# Altium PCB 2012_BALISE_CARTE_EMETTEUR.PCBDOC
Units mil, origin at the board's own origin, x right, y up, seen from the top; angles counter-clockwise.
Board outline 2480 x 2480 mil, 4 copper layers (1-TOP, 2-Signal, 3-GND, 4-BOT); 90 components, 78 nets, 405 pads, 0 vias.
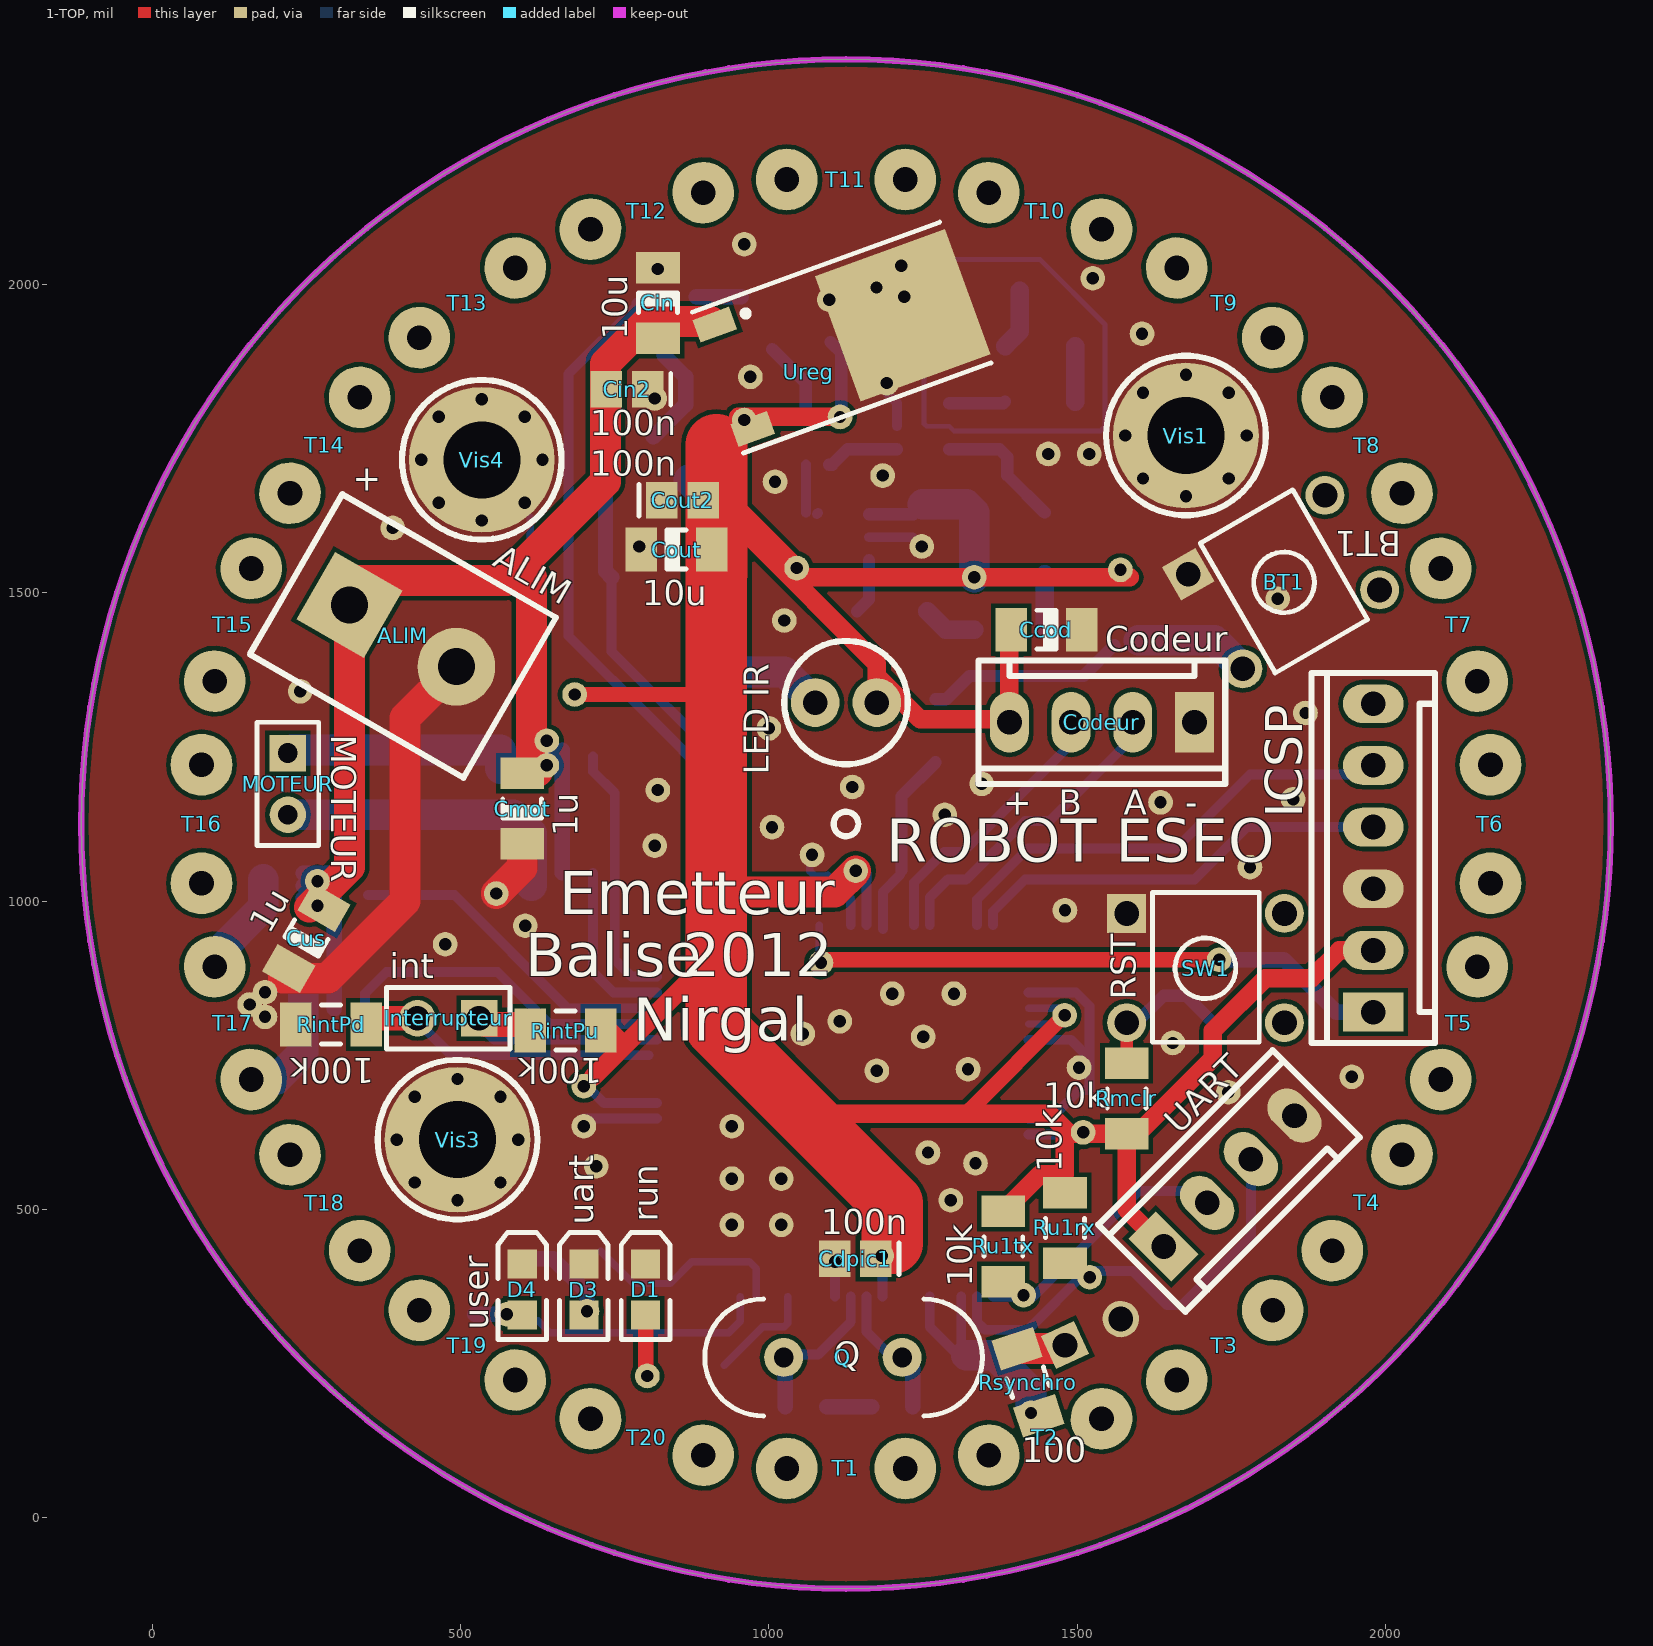
[diagram p0: 1-TOP view]
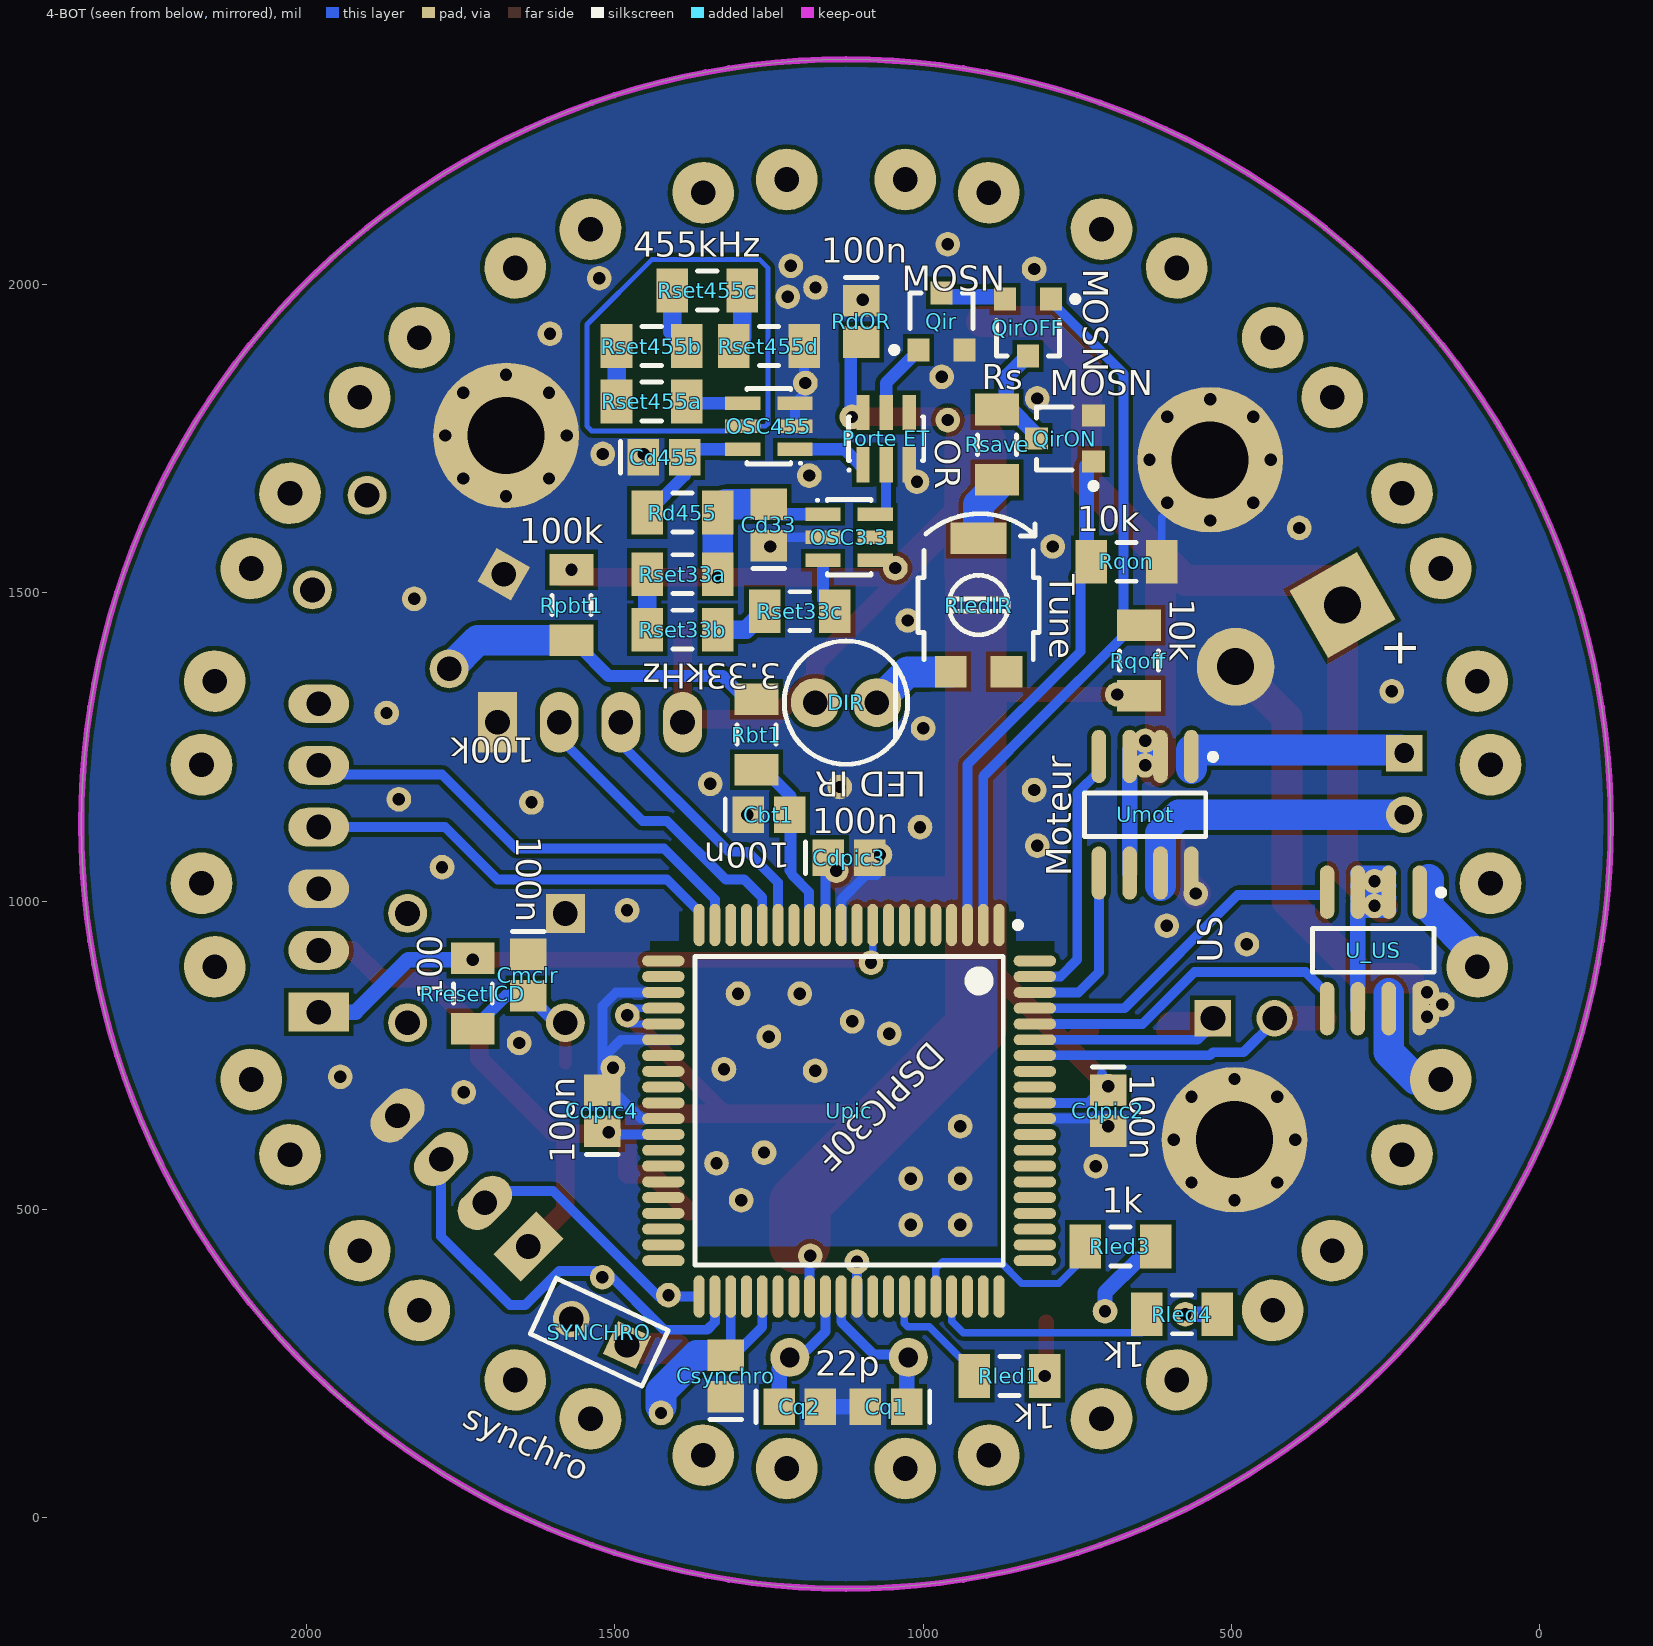
[diagram p1: 4-BOT view, seen from below]
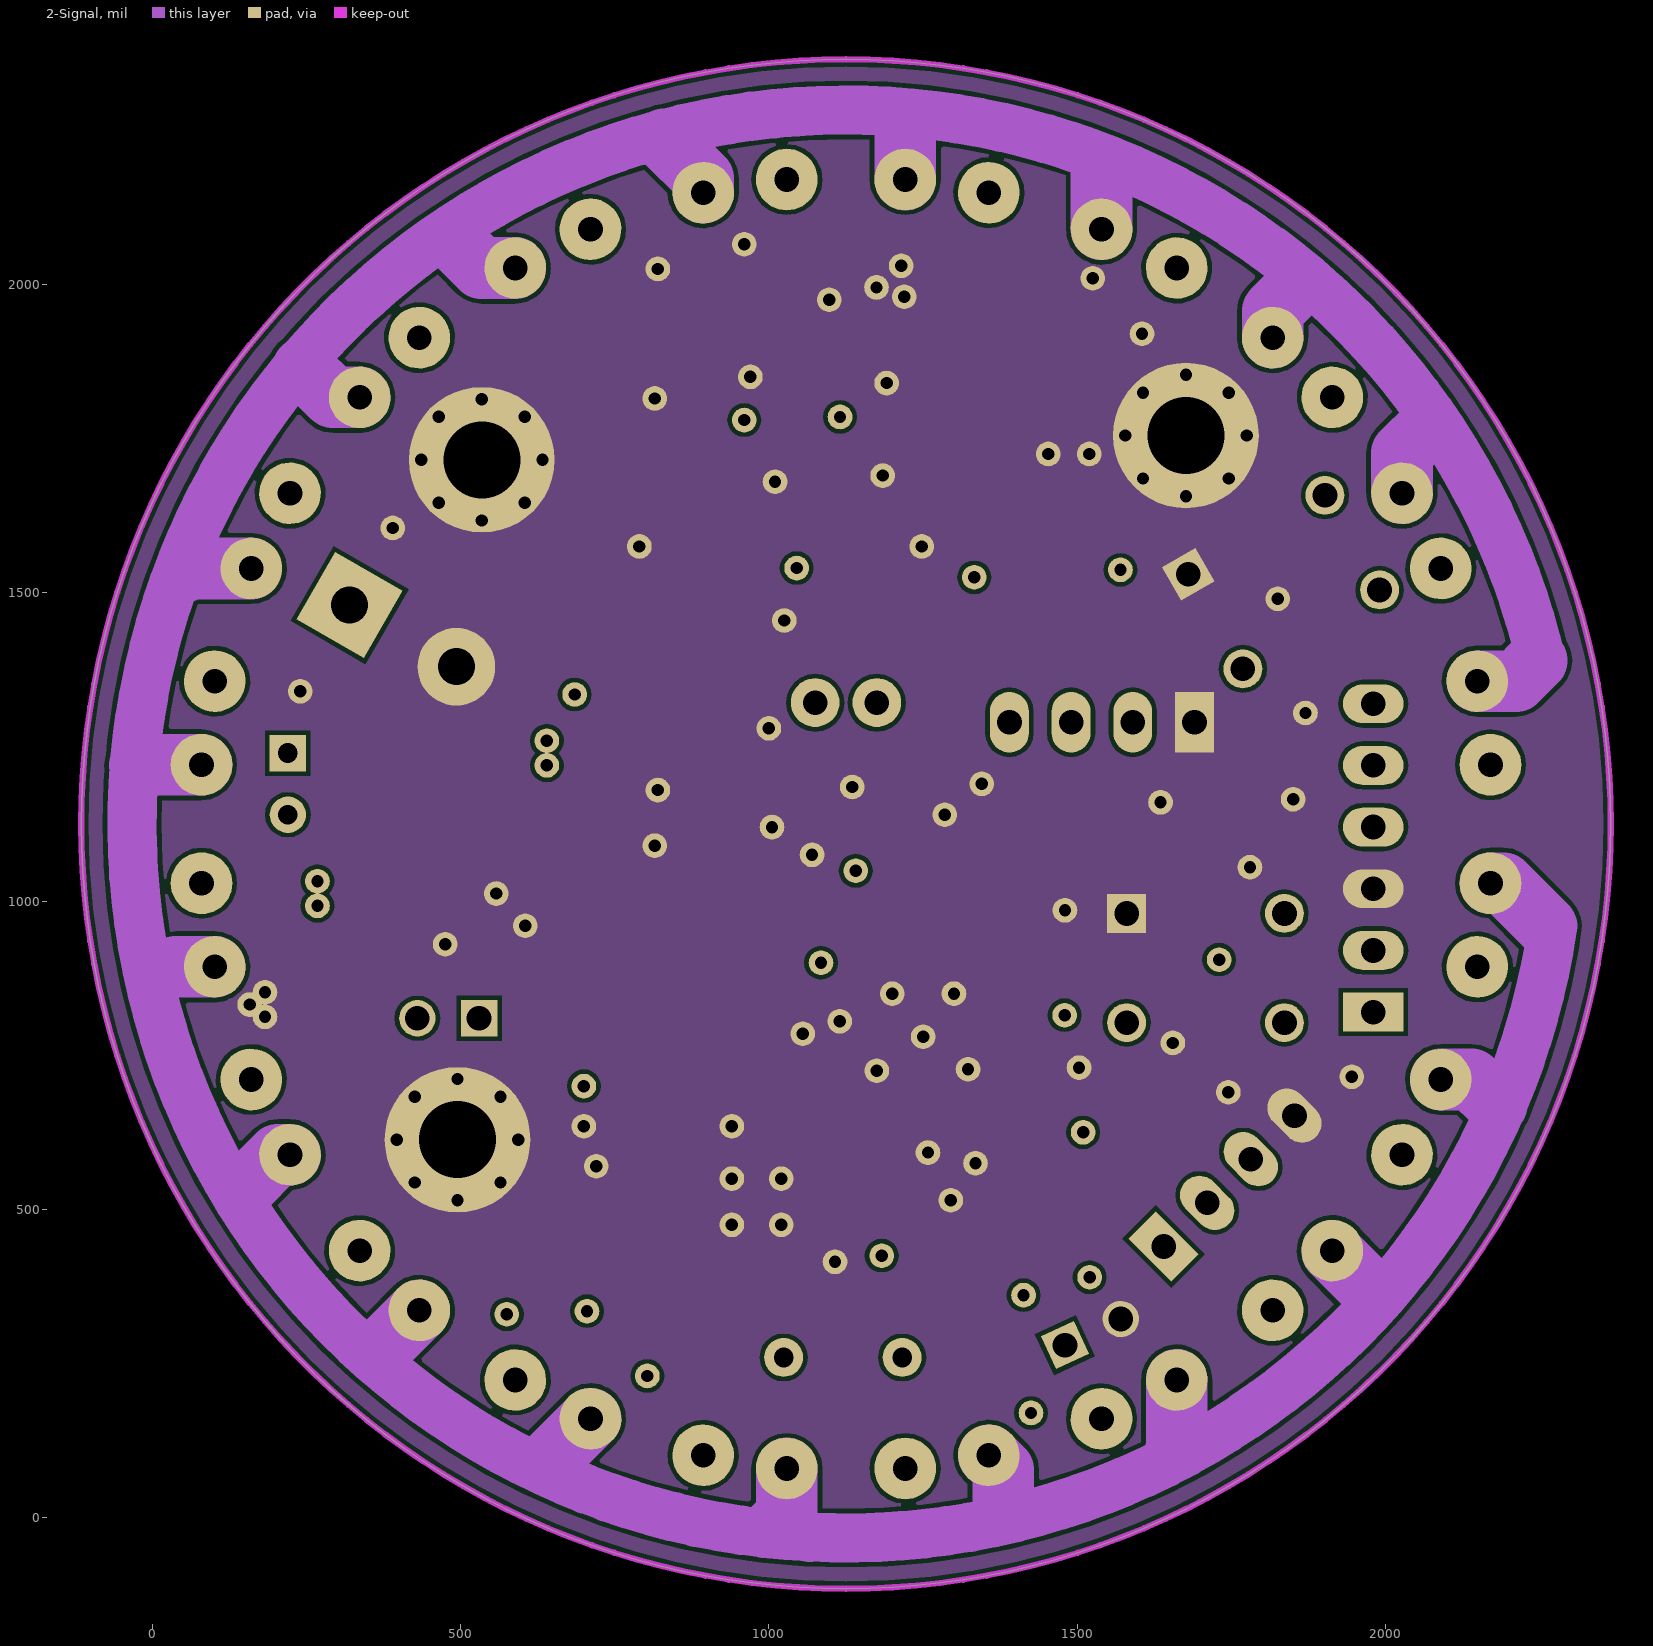
[diagram p2: 2-Signal]
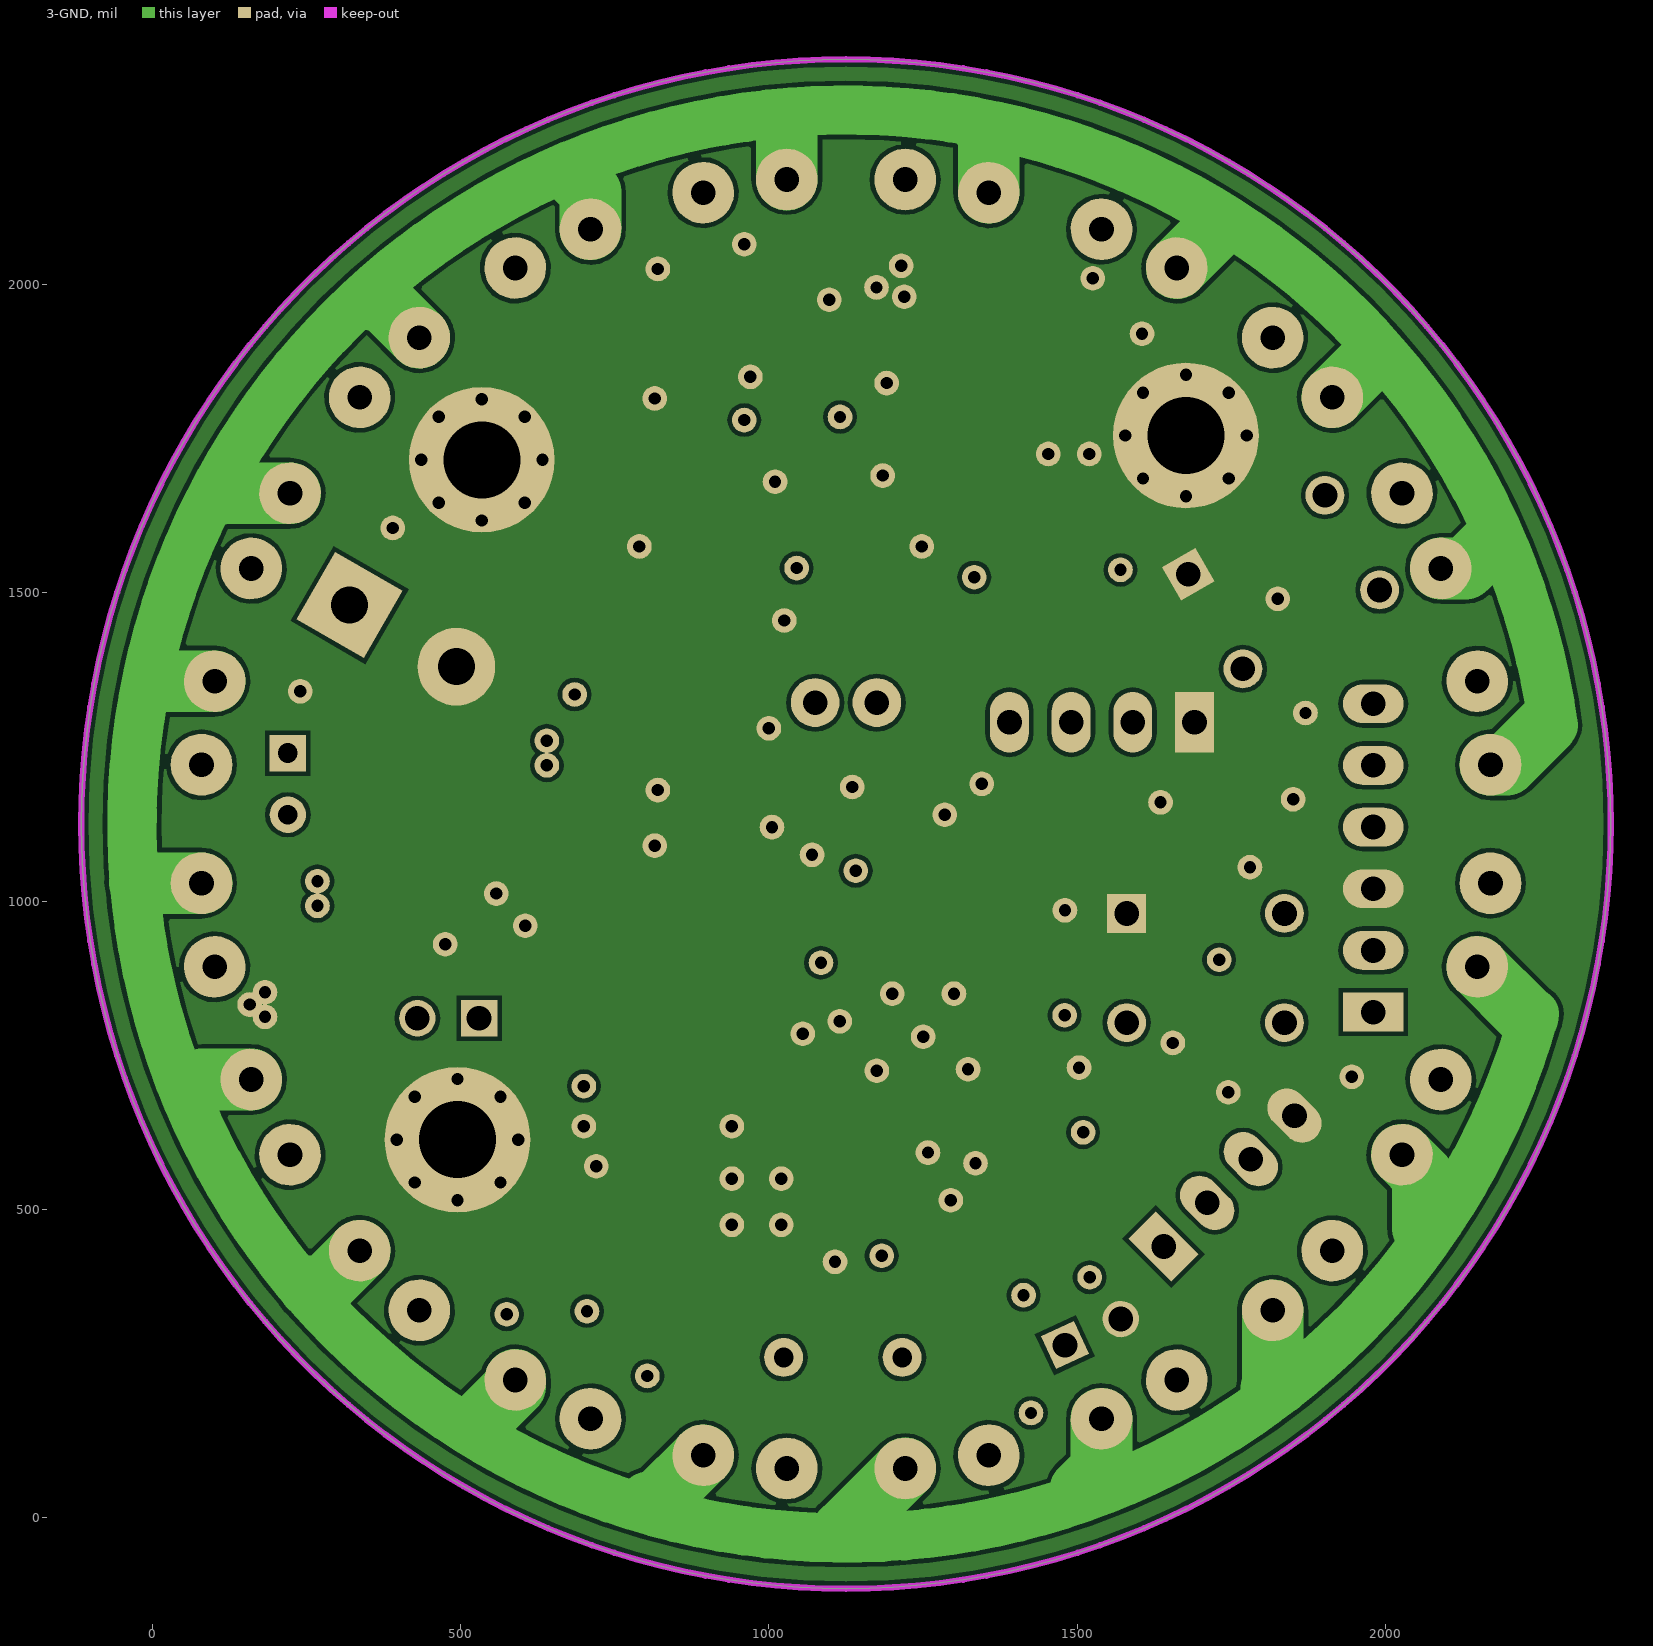
[diagram p3: 3-GND]
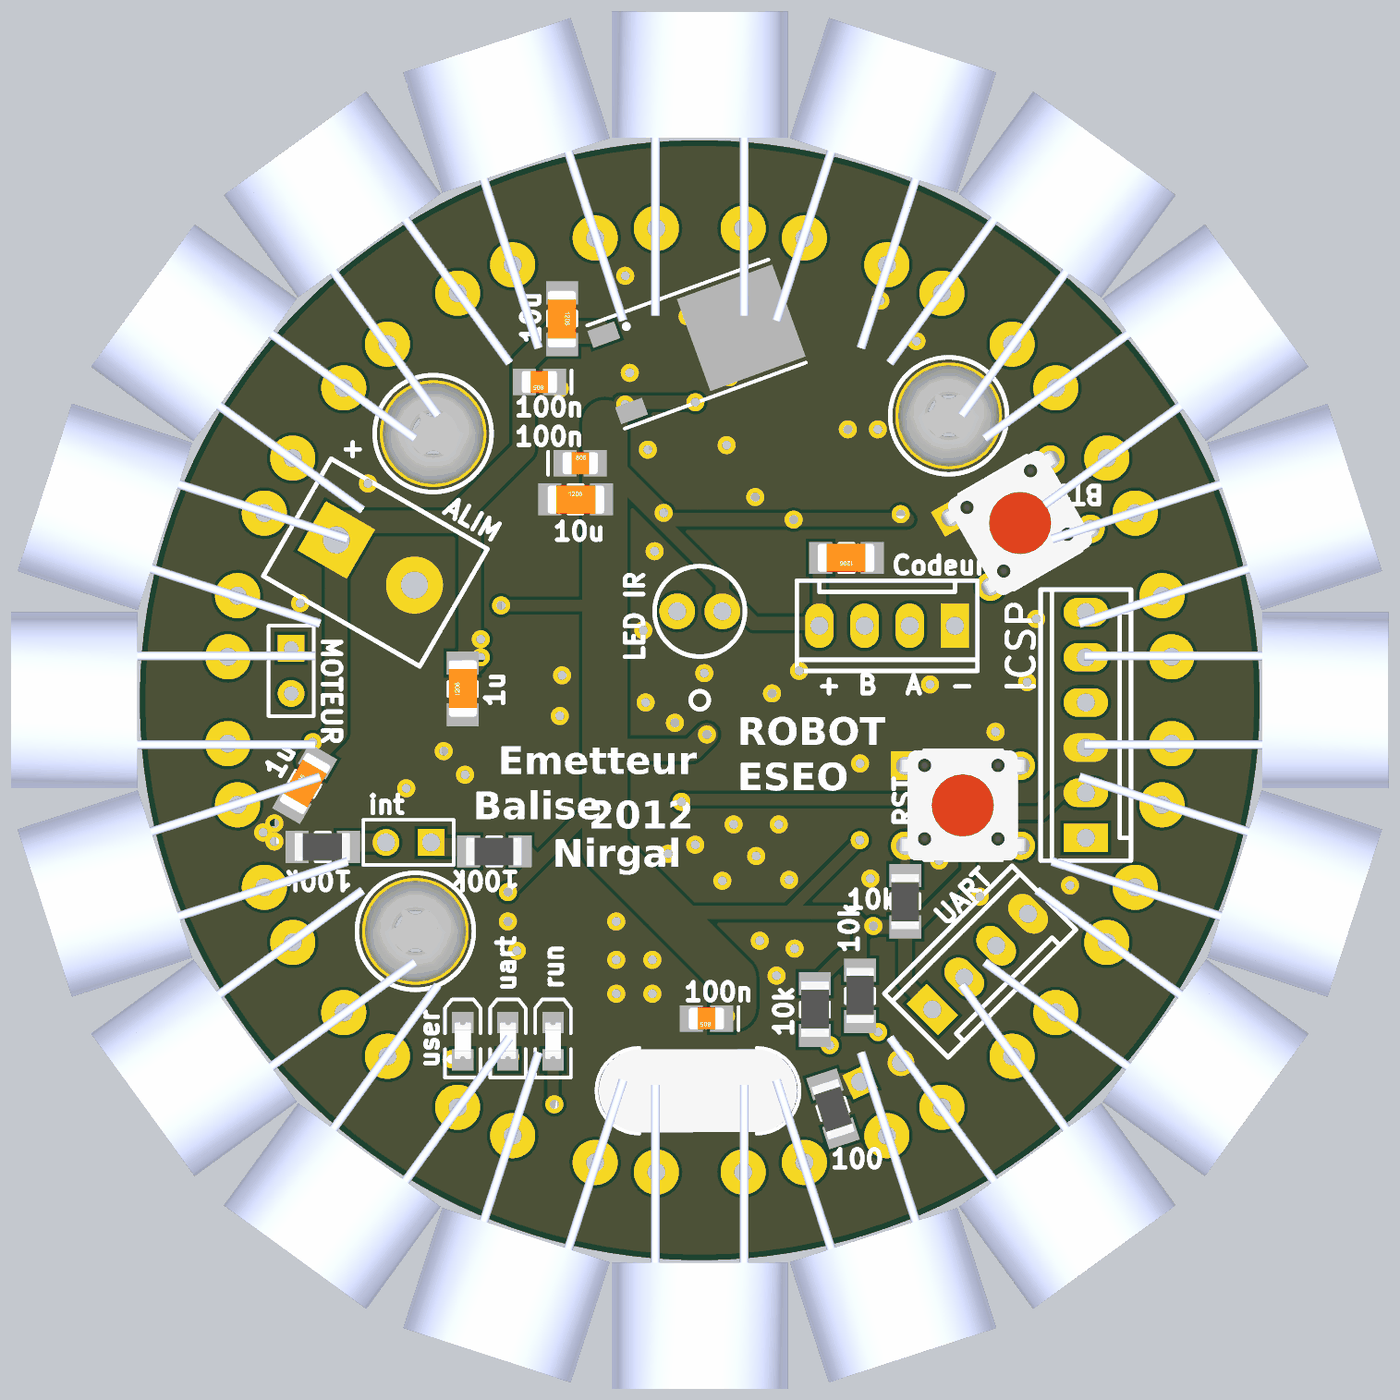
[diagram p4: 3D render of the assembled board from above, using the file's embedded part models]
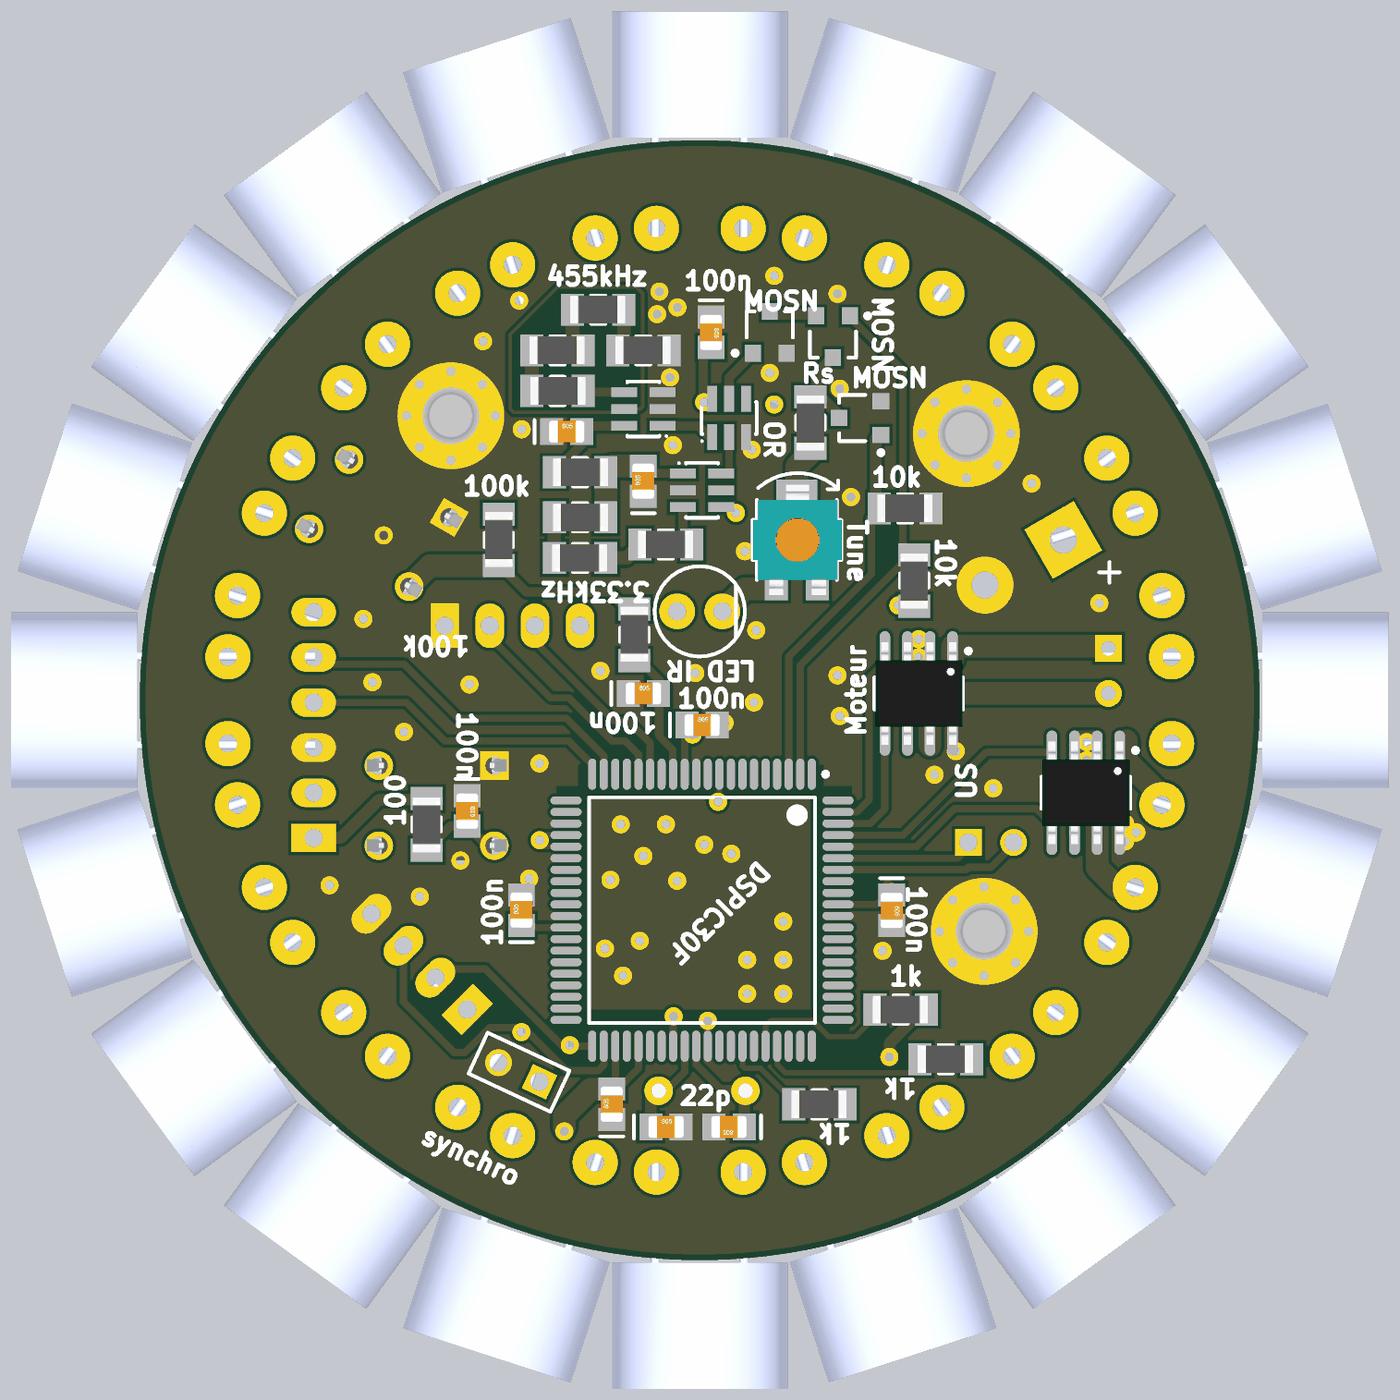
[diagram p5: 3D render of the assembled board from below, using the file's embedded part models]

## Layer stack, top to bottom
1-TOP: signal copper 1.4
Dielectric: core 12.6, FR-4, Dk 4.8
2-Signal: signal copper 1.4
Dielectric: prepreg 12.6, FR-4, Dk 4.8
3-GND: signal copper 1.4
Dielectric: core 12.6, FR-4, Dk 4.8
4-BOT: signal copper 1.4

## Board outline
-115,1125 ccw(c1125,1125) 1125,-115 ccw(c1125,1125) 2365,1125 ccw(c1125,1125) 1125,2365 ccw(c1125,1125)

## Design rules (kind name [scope] priority, off if disabled: settings)
Clearance [All] p1: gap=7
FabricationTestPointUsage TestPointUsage [All] p1: valid=0 allowmultiple=FALSE
FabricationTestpoint Testpoint [(IsPad And (OnTopLayer Or OnBottomLayer))] p1: side=3 testpointundercomponent=TRUE minsize=40 maxsize=100 preferedsize=60 minholesize=0 maxholesize=40 preferedholesize=32 testpointgrid=1 allowsidetop=TRUE allowsidebottom=TRUE usegrid=TRUE gridtolerance=0.01
PlaneConnect [All] p1: planeconnectstyle=Direct reliefexpansion=25 reliefentries=4 reliefconductorwidth=12 reliefairgap=15
PolygonConnect [All] p1: connectstyle=Direct reliefconductorwidth=10 reliefentries=4 polygonreliefangle="90 Angle"
RoomDefinition 2012_BALISE_CARTE_EMETTEUR [InComponentClass('2012_BALISE_CARTE_EMETTEUR')] p1: confinementstyle=ConfineIn formatcopy=TRUE lockcomponents=FALSE outline -6448.4,-2900 -4448.4,-2900 -4448.4,-1900 -6448.4,-1900
RoutingLayers RoutingLayers_1 [All] p1: top layer_v5=TRUE mid layer 1_v5=FALSE mid layer 2_v5=FALSE bottom layer_v5=TRUE
RoutingLayers [All] p2: top layer_v5=TRUE mid layer 1_v5=FALSE mid layer 2_v5=FALSE bottom layer_v5=TRUE
RoutingVias [All] p1: holewidth=24 width=50 viastyle="Through Hole" minholewidth=24 minwidth=50 maxholewidth=24 maxwidth=50
SilkscreenOverComponentPads [All] p1: minsilkscreentomaskgap=10
SolderMaskExpansion [All] p1: expansion=0
Width ALIM [InNet('0') Or InNet('VDD')] p1: maxlimit=100 minlimit=10 preferedwidth=25
Width [All] p2: maxlimit=150 minlimit=5 preferedwidth=16
23 further rules are at their usual default settings.

## Components (designator, comment, footprint, x,y, rotation, side; value= is the part's Value field where it differs from the comment)
ALIM "ALIM" BORNIER2 320,1480 r330 top
BT1 "SW_Pushbutton_6x6mm_Vertical" "Switch 6x6 Vertical" 1680,1530 r30 top
Cbt1 "100nF" C0805_N 1250,1140 r180 bottom
Ccod "1uF" C1206_N 1450,1440 r180 top
Cd33 "100n" C0805_N 1250,1610 r90 bottom
Cd455 "100n" C0805_N 1420,1720 r180 bottom
Cdpic1 "100nF" C0805_N 1140,420 r180 top
Cdpic2 "100nF" C0805_N 700,660 r270 bottom
Cdpic3 "100nF" C0805_N 1120,1070 r180 bottom
Cdpic4 "100nF" C0805_N 1520,660 r90 bottom
Cin "10uF" C1206_N 820,1970 r270 top
Cin2 "10nF" C0805_N 770,1830 r180 top
Cmclr "100nF" C0805_N 1640,880 r270 bottom
Cmot "1uF" C1206_N 600,1150 r90 top
Codeur "BARRETTE4" HE14_4 1690,1290 r180 top
Cout "10uF" C1206_N 850,1570 r0 top
Cout2 "100nF" C0805_N 860,1650 r0 top
Cq1 "22pF" C0805_N 1060,180 r0 bottom
Cq2 "22pF" C0805_N 1200,180 r180 bottom
Csynchro "1nF" C0805_N 1320,230 r90 bottom
Cus "1uF" C1206_N 250,940 r60 top
D1 "LED" LED_0805 800,370 r90 top
D3 "LED" LED_0805 700,370 r90 top
D4 "LED" LED_0805 600,370 r90 top
DIR "LED" LED5 1075,1321.85 r90 bottom
ICSP "BARRETTE6" HE14_6 1980,820 r90 top
Interrupteur "Interrupteur" HEADER2#1 530,810 r180 top
MOTEUR "MOTEUR" HEADER2#2 220,1240 r270 top
OSC3.3 "LTC6900" SOT23-6 1120,1590 r270 bottom
OSC455 "LTC6906" SOT23-6 1250,1770 r90 bottom
"Porte ET" "FAR 1697256 (SOT23-5 !)" SOT23-6 1060,1750 r180 bottom
Q "QU" HC49US 1120,260 r180 top
Qir "IRLML2803" SOT-23 970,1940 r180 bottom
QirOFF "IRLML2803" SOT-23 830,1930 r0 bottom
QirON "IRLML2803" SOT-23 770,1750 r90 bottom
Rbt1 "100k" R1206_N 1270,1270 r90 bottom
Rd455 "1K" R1206_N 1390,1630 r180 bottom
RdOR "100n" C0805_N 1100,1940 r270 bottom
RintPd "100k" R1206_N 290,800 r180 top
RintPu "100k" R1206_N 670,790 r180 top
Rled1 "1K" R1206_N 860,230 r0 bottom
Rled3 "1K" R1206_N 680,440 r0 bottom
Rled4 "1K" R1206_N 580,330 r0 bottom
RledIR "100" Trimmer_Bourns_3314G 910,1480 r180 bottom
Rmclr "10k" R1206_N 1580,680 r270 top
Rpbt1 "100k" R1206_N 1570,1480 r90 bottom
Rqoff "10k" R1206_N 650,1390 r270 bottom
Rqon "10k" R1206_N 670,1550 r0 bottom
RresetICD "100" R1206_N 1730,850 r270 bottom
Rsave "100" R1206_N 880,1740 r270 bottom
Rset33a "0K" R1206_N 1390,1530 r180 bottom
Rset33b "0K" R1206_N 1390,1440 r0 bottom
Rset33c "600K" R1206_N 1200,1470 r0 bottom
Rset455a "220K" R1206_N 1440,1810 r180 bottom
Rset455b "0K" R1206_N 1440,1900 r0 bottom
Rset455c "0K" R1206_N 1350,1990 r0 bottom
Rset455d "0K" R1206_N 1250,1900 r0 bottom
Rsynchro "100" R1206_N 1420,220 r288 top
Ru1rx "10k" R1206_N 1480,470 r90 top
Ru1tx "10k" R1206_N 1380,440 r90 top
SW1 "SW_Pushbutton_6x6mm_Vertical" "Switch 6x6 Vertical" 1580,980 r0 top
SYNCHRO "SYNCHRO" HEADER2#1 1480,280 r25 bottom
T1 "40kHz" "MA40S4R/S Transducteur US - 3D haut de carte" 1125,80 r180 top locked
T2 "40kHz" "MA40S4R/S Transducteur US - 3D haut de carte" 1448,131 r198 top locked
T3 "40kHz" "MA40S4R/S Transducteur US - 3D haut de carte" 1739,280 r216 top locked
T4 "40kHz" "MA40S4R/S Transducteur US - 3D haut de carte" 1970,511 r234 top locked
T5 "40kHz" "MA40S4R/S Transducteur US - 3D haut de carte" 2119,802 r252 top locked
T6 "40kHz" "MA40S4R/S Transducteur US - 3D haut de carte" 2170,1125 r270 top locked
T7 "40kHz" "MA40S4R/S Transducteur US - 3D haut de carte" 2119,1448 r288 top locked
T8 "40kHz" "MA40S4R/S Transducteur US - 3D haut de carte" 1970,1739 r306 top locked
T9 "40kHz" "MA40S4R/S Transducteur US - 3D haut de carte" 1739,1970 r324 top locked
T10 "40kHz" "MA40S4R/S Transducteur US - 3D haut de carte" 1448,2119 r342 top locked
T11 "40kHz" "MA40S4R/S Transducteur US - 3D haut de carte" 1125,2170 r0 top locked
T12 "40kHz" "MA40S4R/S Transducteur US - 3D haut de carte" 802,2119 r18 top locked
T13 "40kHz" "MA40S4R/S Transducteur US - 3D haut de carte" 511,1970 r36 top locked
T14 "40kHz" "MA40S4R/S Transducteur US - 3D haut de carte" 280,1739 r54 top locked
T15 "40kHz" "MA40S4R/S Transducteur US - 3D haut de carte" 131,1448 r72 top locked
T16 "40kHz" "MA40S4R/S Transducteur US - 3D haut de carte" 80,1125 r90 top locked
T17 "40kHz" "MA40S4R/S Transducteur US - 3D haut de carte" 131,802 r108 top locked
T18 "40kHz" "MA40S4R/S Transducteur US - 3D haut de carte" 280,511 r126 top locked
T19 "40kHz" "MA40S4R/S Transducteur US - 3D haut de carte" 511,280 r144 top locked
T20 "40kHz" "MA40S4R/S Transducteur US - 3D haut de carte" 802,131 r162 top locked
U_US "BD6220F" SO8_N 270,920 r270 bottom
UART "BARRETTE4" HE14_4 1640,440 r45 top
Umot "BD6220F" SO8_N 640,1140 r270 bottom
Upic "dsPIC30F6010A" TQFP80_N 1120,660 r270 bottom
Ureg "MC7805BDTG" 369A-13 1080,1900 r290 top
Vis1 "Pad_M3" M3x6mm 1676.18,1754.92 r0 top locked
Vis3 "Pad_M3" M3x6mm 495.08,613.19 r0 top locked
Vis4 "Pad_M3" M3x6mm 534.45,1715.55 r0 top

## Footprints (in the part's own frame and the unit in brackets; to place one, negate y for a bottom-side part, rotate by r counter-clockwise, add the part's x,y. Pads: shape width x height; smd on the part's side, far side on the other; paste and mask are expansions set on the pad)
369A-13 [mm] "D-PAK/TO-252-AA; 3 Leads (1 Cropped); Body 10.3 (inc. leads) x 6.7 mm (LxW max)"
  rect 1x1.6 smd: 1(-2.285,-3.7) 3(2.285,-3.7)
  rect 5.5x5.7 smd: 4(0,3.7)
  silkscreen extent -3.09,-4.4 3.08,6.45
BORNIER2 [mm] "Connector; Header; 2 Position; screw terminal blocks, Pin Spacing=5.08mm"
  rect 3.2x3.2 hole 1.524: 1(0,0)
  round 3.2 hole 1.524: 2(5.08,0)
  silkscreen extent -2.54,-3.81 7.62,3.81
C0805_N [mm] "Chip Capacitor, Body 2.0x1.3mm, IPC Medium Density"
  rect 1.3x1.5 smd: 1(-0.85,0) 2(0.85,0)
  silkscreen extent -1.8,-0.65 -1.8,0.65, body extent -0.99,-0.63 1.01,0.63, height 0.8
C1206_N [mm] "Chip Capacitor, Body 3.2x1.6mm, IPC Medium Density"
  rect 1.3x1.8 smd: 1(-1.45,0) 2(1.45,0)
  silkscreen extent -0.4,-0.8 0.4,0.8, body extent -1.57,-0.81 1.63,0.79, height 1.02
HC49US [mil] "Quartz Crystal, HC49 Bas profil, Pas 4,88mm"
  round 63 hole 32: 1(-96.06,0) 2(96.06,0)
  silkscreen extent -226,-95 224,95, body extent -221,-92 219,92, height 143
HE14_4 [mm] "Connector; HE14; 4 Position; Pin Spacing=2.54mm"
  rect 1.6x2.5 hole 1.016: 1(0,0)
  oval 1.6x2.5 hole 1.016: 2(2.54,0) 3(5.08,0) 4(7.62,0)
  silkscreen extent -1.27,-2.54 8.89,2.54
HE14_6 [mm] "Connector; HE14; 6 Position; Pin Spacing=2.54mm"
  rect 1.6x2.5 hole 1.016: 1(0,0)
  oval 1.6x2.5 hole 1.016: 2(2.54,0) 3(5.08,0) 4(7.62,0) 5(10.16,0) 6(12.7,0)
  silkscreen extent -1.27,-2.54 13.97,2.54
HEADER2#1 [mm] "Connector; Header; 2 Position"
  rect 1.5x1.5 hole 1.016: 1(0,0)
  round 1.5 hole 1.016: 2(2.54,0)
  silkscreen extent -1.27,-1.27 3.81,1.27
HEADER2#2 [mm] "Connector; Header; 2 Position"
  rect 1.5x1.5 hole 0.813: 1(0,0)
  round 1.5 hole 0.813: 2(2.54,0)
  silkscreen extent -1.27,-1.27 3.81,1.27
LED5 [mil] "LED; 5mm; Pin Spacing=2.54mm"
  round 79 hole 40: 1(0,100) 2(0,0)
  silkscreen extent -100,-50 100,150
LED_0805 [mm] "SM LED; 2 Flat Leads"
  rect 1.2x1.2 smd: 1(-1.05,0) 2(1.05,0)
  silkscreen extent -2.05,-1 2.35,1, body extent -1.05,-0.64 1.06,0.64, height 1.2
M3x6mm [mm] "Vis M3 X 6mm _TORX_Tête 6mm"
  round 0.8 hole 0.508: 1(-2.5,0) 1(-1.768,-1.768) 1(-1.768,1.768) 1(0,-2.5) 1(0,2.5) 1(1.768,-1.768) 1(1.768,1.768) 1(2.5,0)
  round 6 hole 3.175: 1(0,0)
  silkscreen extent -3.29,-3.28 3.29,3.28, body extent -2.84,-2.85 2.86,2.85, height 1.67
"MA40S4R/S Transducteur US - 3D haut de carte" [mil]
  round 100 hole 40: 1(-96.06,0) 2(96.06,0)
  body extent -195,-193 195,480, height 391
R1206_N [mm] "Chip Resistor, Body 3.2x1.6mm, IPC Medium Density"
  rect 1.3x1.8 smd: 1(-1.45,0) 2(1.45,0)
  silkscreen extent -0.4,-0.8 0.4,0.8, body extent -1.68,-0.87 1.68,0.87, height 0.71
SO8_N [mm] "8-Pin Small Outline Integrated Circuit 1.27 mm Pitch, IPC Medium Density"
  oval 2.2x0.6 smd: 1(-2.4,1.905) 2(-2.4,0.635) 3(-2.4,-0.635) 4(-2.4,-1.905) 5(2.4,-1.905) 6(2.4,-0.635) 7(2.4,0.635) 8(2.4,1.905)
  silkscreen extent -2.51,-2.5 0.9,2.92, body extent -2.89,-2.45 2.89,2.46, height 1.75
SOT23-6 [mm] "SOT-23/SC-74A; 5 Leads; Body 3.1 x 3 mm, inc. leads (LxW max)"
  rect 0.55x1.45 smd: 1(-0.95,-1.075) 2(0,-1.075) 3(0.95,-1.075) 4(0.95,1.075) 5(0,1.075) 6(-0.95,1.075)
  silkscreen extent -1.57,-1.35 1.55,0.9
SOT-23 [mm] "SOT-23; 3 Leads; Body 3.1 x 2.5 mm, inc. leads (LxW max)"
  rect 0.9x0.95 smd: 1(-0.95,-1.175) 2(0.95,-1.175) 3(0,1.175)
  silkscreen extent -2.07,-1.3 1.3,1.18
"Switch 6x6 Vertical" [mm]
  rect 1.6x1.6 hole 1.016: 1(0,0)
  round 1.6 hole 1.016: 2(6.5,0) 3(0,-4.5) 4(6.5,-4.5)
  silkscreen extent 1.07,-5.31 5.46,0.86, body extent -2.96,-8.26 9.44,3.79, height 7
TQFP80_N [mm] "80-Pin Thin Plastic Quad Flat Pack 0.65 mm Pitch, IPC Medium Density"
  oval 1.75x0.45 smd: 1(-7.65,6.175) 2(-7.65,5.525) 3(-7.65,4.875) 4(-7.65,4.225) 5(-7.65,3.575) 6(-7.65,2.925) 7(-7.65,2.275) 8(-7.65,1.625) 9(-7.65,0.975) 10(-7.65,0.325) 11(-7.65,-0.325) 12(-7.65,-0.975) 13(-7.65,-1.625) 14(-7.65,-2.275) 15(-7.65,-2.925) 16(-7.65,-3.575) 17(-7.65,-4.225) 18(-7.65,-4.875) 19(-7.65,-5.525) 20(-7.65,-6.175) 41(7.65,-6.175) 42(7.65,-5.525) 43(7.65,-4.875) 44(7.65,-4.225) 45(7.65,-3.575) 46(7.65,-2.925) 47(7.65,-2.275) 48(7.65,-1.625) 49(7.65,-0.975) 50(7.65,-0.325) 51(7.65,0.325) 52(7.65,0.975) 53(7.65,1.625) 54(7.65,2.275) 55(7.65,2.925) 56(7.65,3.575) 57(7.65,4.225) 58(7.65,4.875) 59(7.65,5.525) 60(7.65,6.175)
  oval 0.45x1.75 smd: 21(-6.175,-7.65) 22(-5.525,-7.65) 23(-4.875,-7.65) 24(-4.225,-7.65) 25(-3.575,-7.65) 26(-2.925,-7.65) 27(-2.275,-7.65) 28(-1.625,-7.65) 29(-0.975,-7.65) 30(-0.325,-7.65) 31(0.325,-7.65) 32(0.975,-7.65) 33(1.625,-7.65) 34(2.275,-7.65) 35(2.925,-7.65) 36(3.575,-7.65) 37(4.225,-7.65) 38(4.875,-7.65) 39(5.525,-7.65) 40(6.175,-7.65) 61(6.175,7.65) 62(5.525,7.65) 63(4.875,7.65) 64(4.225,7.65) 65(3.575,7.65) 66(2.925,7.65) 67(2.275,7.65) 68(1.625,7.65) 69(0.975,7.65) 70(0.325,7.65) 71(-0.325,7.65) 72(-0.975,7.65) 73(-1.625,7.65) 74(-2.275,7.65) 75(-2.925,7.65) 76(-3.575,7.65) 77(-4.225,7.65) 78(-4.875,7.65) 79(-5.525,7.65) 80(-6.175,7.65)
  silkscreen extent -7.77,-6.35 6.35,7.07, body extent -7,-7 7,7, height 1.6
Trimmer_Bourns_3314G [mm] "Trimmer monotour, Bourns,serie 3314P"
  rect 1.3x1.3 smd: 1(-1.15,-2.75) 3(1.15,-2.75)
  rect 2.3x1.3 smd: 2(0,2.75)
  silkscreen extent -2.5,-2.25 2.5,3.76, body extent -2.46,-3.1 2.54,3.1, height 2.55

## Part data
ALIM: library part BORNIER2
BT1 SW1: "Switch tactil 6mm x 6mm Vertical"
Cbt1 Cdpic1 Cdpic2 Cdpic3 Cdpic4 Cin Cin2 Cmclr Cout Cout2 Cq1 Cq2 Csynchro: library part Capacitor, "Capacitor"
Ccod Cd33 Cd455 Cmot Cus RdOR T1 T2 T3 T4 T5 T6 T7 T8 T9 T10 T11 T12 T13 T14 T15 T16 T17 T18 T19 T20: library part Condensateur, "Capacitor"
Codeur UART: "Header, 4-Pin"
D1 D3 D4: "Typical LED"
DIR: "Typical RED, GREEN, YELLOW, AMBER GaAs LED"
ICSP: "Header, 6-Pin"
Interrupteur MOTEUR SYNCHRO: library part BARRETTE2, "Header, 2-Pin"
OSC3.3 OSC455 "Porte ET": library part SOT23-6, "Header, 3-Pin, Dual row"
Q: library part QUARTZ_DROIT_BAS_PROFIL, "Crystal Oscillator"
Qir QirOFF QirON: "HEXFET Power MOSFET"
Rbt1 Rd455 RintPd RintPu Rled1 Rled3 Rled4 Rmclr Rpbt1 Rqoff Rqon RresetICD Rsave Rset33a Rset33b Rset33c Rset455a Rset455b Rset455c Rset455d Rsynchro Ru1rx Ru1tx: library part Resistor, "Resistor"
RledIR: library part "Trimmer monotour, Bourns,serie 3314P", "Trimmer monotour, Bourns,serie 3314P"
U_US Umot: "H Bridge - 2A"
Upic: "High-Performance, 16-bit Digital Signal Controllers"
Ureg: library part MC7805ACD2T, "Three-Terminal Positive Voltage Regulator"
Vis1 Vis3 Vis4: library part "Vis M3 X 6mm _TORX_Tête 6mm", "Vis M3 X 6mm _TORX_Tête 6mm"

## Free pads (board coordinates)
  round 40 hole 20: 0(157.91,832.2) 0(182.91,812.2) 0(182.91,852.2) 0(240,1340) 0(267.91,992.2) 0(267.91,1032.2) 0(390,1605) 0(475,930) 0(557.91,1012.2) 0(575,330) 0(605,960) 0(640,1220) 0(640,1260) 0(685,1335) 0(700,635) 0(700,700) 0(705,335) 0(720,570) 0(790,1575) 0(802.91,230) 0(815,1090) 0(815,1815) 0(820,1180) 0(820,2025) 0(940,475) 0(940,550) 0(940,635) 0(960,1780) 0(960,2065) 0(970,1850) 0(1000,1280) 0(1005,1120) 0(1010,1680) 0(1020,475) 0(1020,550) 0(1025,1455) 0(1045,1540) 0(1055,785) 0(1070,1075) 0(1084.45,900) 0(1097.91,1975) 0(1107.2,415) 0(1115,805) 0(1115.32,1785) 0(1135,1185) 0(1140.85,1049.13) 0(1174.45,1995) 0(1175,725) 0(1182.91,425) 0(1184.45,1690) 0(1190.83,1840) 0(1200,850) 0(1214.45,2030) 0(1219.45,1980) 0(1247.91,1575) 0(1250,780) 0(1257.91,592.2) 0(1285,1140) 0(1295,515) 0(1300,850) 0(1322.91,727.2) 0(1332.91,1525) 0(1335,575) 0(1345,1190) 0(1412.91,361.02) 0(1425,170) 0(1452.91,1725) 0(1479.45,815) 0(1480,985) 0(1502.91,730) 0(1509.45,625) 0(1519.45,1725) 0(1520,390) 0(1525,2010) 0(1570,1537.09) 0(1605,1920) 0(1635,1160) 0(1655,770) 0(1730,905) 0(1745,690) 0(1780,1055) 0(1825,1490) 0(1850,1165) 0(1870,1305) 0(1945,715)

## Nets (pads, with @x,y where several pads share a name; then routed paths per layer and width w, separated by ;. In a path a pad name is that pad's centre, name@x,y a point inside that pad or via, vN(x,y) a via of type N, cw(c..) or ccw(c..) an arc to the next point about the centre after c; other vN are vias at no path point)
BT1: BT1.3 Rbt1.2 Rpbt1.1 | length 514.2
  4-BOT w20: Rbt1.2 1287.09,1327.09 1325,1365 1510,1365 Rpbt1.1@1560,1415
  4-BOT w50: Rpbt1.1@1600,1422.91 1722.24,1422.91 BT1.3
C1RX: Upic.72
C1TX: Upic.73
GND: "Porte ET.3" ALIM.2 BT1.1 Cbt1.1 Ccod.1 Cd33.1 Cd455.1 Cdpic1.2 Cdpic2.2 Cdpic3.2 Cdpic4.2 Cin2.1 Cin.1 Cmclr.1 Cmot.1 Codeur.1 Cout2.1 Cout.1 Cq1.2 Cq2.2 Csynchro.1 Cus.1 D1.2 D3.2 D4.2 ICSP.3 OSC3.3.2 OSC455.2 OSC455.3 pad.0@157.91,832.2 pad.0@182.91,812.2 pad.0@182.91,852.2 pad.0@240,1340 pad.0@390,1605 pad.0@475,930 pad.0@557.91,1012.2 pad.0@605,960 pad.0@700,635 pad.0@720,570 pad.0@790,1575 pad.0@815,1090 pad.0@815,1815 pad.0@820,1180 pad.0@820,2025 pad.0@940,475 pad.0@940,550 pad.0@940,635 pad.0@960,2065 pad.0@970,1850 pad.0@1000,1280 pad.0@1005,1120 pad.0@1010,1680 pad.0@1020,475 pad.0@1020,550 pad.0@1025,1455 pad.0@1055,785 pad.0@1070,1075 pad.0@1097.91,1975 pad.0@1107.2,415 pad.0@1115,805 pad.0@1135,1185 pad.0@1174.45,1995 pad.0@1175,725 pad.0@1184.45,1690 pad.0@1190.83,1840 pad.0@1200,850 pad.0@1214.45,2030 pad.0@1219.45,1980 pad.0@1247.91,1575 pad.0@1250,780 pad.0@1257.91,592.2 pad.0@1285,1140 pad.0@1295,515 pad.0@1300,850 pad.0@1322.91,727.2 pad.0@1335,575 pad.0@1345,1190 pad.0@1452.91,1725 pad.0@1480,985 pad.0@1502.91,730 pad.0@1519.45,1725 pad.0@1525,2010 pad.0@1605,1920 pad.0@1635,1160 pad.0@1655,770 pad.0@1745,690 pad.0@1780,1055 pad.0@1825,1490 pad.0@1850,1165 pad.0@1870,1305 pad.0@1945,715 Qir.2 QirON.2 RdOR.1 RintPd.2 Rqon.1 Rset455d.1 SW1.1 SYNCHRO.2 U_US.8 UART.4 Umot.8 Upic.11 Upic.23 Upic.26 Upic.31 Upic.51 Upic.70 Ureg.4 Vis1.1 Vis3.1 Vis4.1 | length 2026.1
  1-TOP w50: Cus.1@212.91,875 285,875 410,1000 410,1296.8 ALIM.2 ; pad.0@557.91,1012.2 600,1054.29 Cmot.1
  4-BOT w12: Vis4.1@560,1675 612.91,1622.09 Rqon.1 ; pad.0@1066.54,1060 1066.54,1048.46 1075,1040 1095,1040
  4-BOT w16: pad.0@700,646.54 700.67,647.2 Upic.70 ; 1095,1040 1132.8,1002.2 Upic.11 ; RdOR.1 RdOR.1@1119.45,1973.46 ; Upic.51 1107.2,424.29 pad.0@1107.91,425 ; OSC3.3.2 1232.91,1590 pad.0@1247.91,1575 ; Rset455d.1 1192.91,1822.17 OSC455.3 OSC455.2 ; Upic.31 1457.2,647.2 1503.46,693.46 Cdpic4.2 1520,830 1498.07,851.93 Upic.23 ; Upic.26 1489.84,775.16 1520,745
  4-BOT w25: Cq1.2 Cq2.2
GUARDRING: OSC455.5 | length 1058.8
  4-BOT w8: OSC455.5@1290,1770 1255.65,1770 1251.78,1773.87 1251.78,2026.86 1264.92,2040 1440,2040 1545,1935 1545,1770 1537.57,1762.57 1299.76,1762.57 OSC455.5
LED1: Rled1.2 Upic.54 | length 174.5
  4-BOT w12: Rled1.2@927.5,247.5 990,310 1025,310 1030.43,315.43 Upic.54
LED2: Upic.55
LED3: Rled3.2 Upic.56 | length 337.9
  4-BOT w12: Rled3.2@727.5,432.5 780,380 840,380 875,415 968.5,415 979.25,404.25 Upic.56
LED4: Rled4.2 Upic.57 | length 384.8
  4-BOT w12: Rled4.2@625,320 645,300 935,300 953.66,318.66 Upic.57
LED5: Upic.64
LED6: Upic.65
MCLR: ICSP.1 pad.0@1084.45,900 pad.0@1730,905 RresetICD.1 Upic.9 | length 980.6
  1-TOP w25: pad.0@1084.45,900 1089.45,905 pad.0@1730,905
  4-BOT w12: pad.0@1081.61,913.39 Upic.9
  4-BOT w25: pad.0@1730,905 1835,905 1920,820 ICSP.1
NetCd455_2: Cd455.2 OSC455.6 Rd455.1 | length 214.5
  4-BOT w20: OSC455.6 1373.94,1732.6 Cd455.2 1386.54,1690.55 Rd455.1
NetCmclr_2: Cmclr.2 Rmclr.1 RresetICD.2 SW1.3 | length 239.8
  1-TOP w20: Rmclr.1 SW1.3
  4-BOT w20: SW1.3@1596.3,802.83 Cmclr.2 1676.38,846.54 RresetICD.2
NetCq1_1: Cq1.1 Q.2 Upic.50 | length 254.2
  4-BOT w16: Q.2@1020,265 1080,265 1132.8,317.8 Upic.50
  4-BOT w25: Cq1.1 Q.2@1026.54,258.46
NetCq2_1: Cq2.1 Q.1 Upic.49 | length 219.3
  4-BOT w12: Q.1@1200,260 Q.1
  4-BOT w16: Upic.49 1158.39,301.61 Q.1@1200,260
  4-BOT w25: Q.1 1233.46,242.6 Cq2.1
NetCsynchro_2: Csynchro.2 pad.0@1425,170 Rsynchro.2 Upic.43 Upic.45 | length 345
  4-BOT w16: Upic.45 1260.75,309.25 Csynchro.2@1300,270 ; Csynchro.2@1311.93,273.07 Upic.43
  4-BOT w50: Csynchro.2 1366.54,263.46 1425,205 pad.0@1425,180
NetD1_1: D1.1 pad.0@802.91,230 Rled1.1 | length 82.1
  1-TOP w25: pad.0@800,235 D1.1@800,317.09
NetD3_1: D3.1 pad.0@705,335 Rled3.1 | length 134.9
  4-BOT w25: Rled3.1@622.91,420 650,420 705,365 pad.0@705,335
NetD4_1: D4.1 pad.0@575,330 Rled4.1 | length 57.1
  4-BOT w25: Rled4.1 pad.0@580,330
NetDIR_2: DIR.2 RledIR.1 | length 140.4
  4-BOT w50: RledIR.1 1025.12,1371.73 DIR.2
NetInterrupteur_1: Interrupteur.1 RintPu.2 Upic.75 | length 387.4
  1-TOP w25: RintPu.2@600,800 RintPu.2@610,790
  1-TOP w40: Interrupteur.1 540,800 RintPu.2@600,800
  4-BOT w16: Interrupteur.1@530,800 554.84,775.16 Upic.75
NetInterrupteur_2: Interrupteur.2 RintPd.1 Upic.74 | length 477.8
  1-TOP w40: RintPd.1@350,810 Interrupteur.2
  4-BOT w16: Interrupteur.2@430,805 480,755 530,755 535,750 Upic.74@805,750
NetMOTEUR_1: MOTEUR.1 Umot.1 | length 377.1
  4-BOT w25: MOTEUR.1 MOTEUR.1@225,1245
  4-BOT w50: MOTEUR.1@225,1245 565,1245 Umot.1@565,1215
NetMOTEUR_2: MOTEUR.2 Umot.7 | length 492.4
  4-BOT w50: MOTEUR.2 585,1140 615,1110 Umot.7@615,1025
NetOSC3.3_3: OSC3.3.3 Rset33c.1 | length 90.6
  4-BOT w20: Rset33c.1 1162.32,1489.41 OSC3.3.3
NetOSC3.3_6: "Porte ET.2" OSC3.3.6 | length 81.2
  4-BOT w16: OSC3.3.6@1060,1629.72 1060,1707.68 ; OSC3.3.6 OSC3.3.6@1080,1629.72
NetOSC455_1: "Porte ET.1" OSC455.1 | length 120.6
  4-BOT w20: 1097.4,1707.68 1102.68,1707.68 1127.6,1732.6 OSC455.1
NetOSC455_4: OSC455.4 Rset455a.2 | length 91.7
  4-BOT w20: OSC455.4 1380.31,1807.4 Rset455a.2
"NetPorte ET_5": "Porte ET.5" Qir.1 | length 125.5
  4-BOT w20: Qir.1@1005,1895 1060,1840 1060,1792.32
NetQir_3: Qir.3 QirOFF.2 | length 72.6
  4-BOT w25: QirOFF.2@882.4,1980 Qir.3@955,1980
NetQirOFF_3: QirOFF.3 QirON.3 Rsave.1 | length 168.7
  4-BOT w25: QirON.3@812.5,1752.5 865,1805 865,1850 QirOFF.3@830,1885
NetRledIR_2: RledIR.2 Rsave.2 | length 111.2
  4-BOT w50: Rsave.2@870,1682.91 910,1642.91 RledIR.2
NetRset33a_1: Rset33a.1 Rset33b.2 | length 90
  4-BOT w30: Rset33b.2 Rset33a.1
NetRset33b_1: Rset33b.1 Rset33c.2 | length 88.3
  4-BOT w30: Rset33c.2 1287.09,1440 Rset33b.1
NetRset455a_1: Rset455a.1 Rset455b.2 | length 90
  4-BOT w30: Rset455a.1 Rset455b.2
NetRset455b_1: Rset455b.1 Rset455c.2 | length 100
  4-BOT w30: Rset455b.1 1407.09,1924.17 Rset455c.2
NetRset455c_1: Rset455c.1 Rset455d.2 | length 95.9
  4-BOT w30: Rset455c.1 1292.91,1914.17 Rset455d.2
NetRsynchro_1: Rsynchro.1 SYNCHRO.1 | length 89.8
  1-TOP w50: Rsynchro.1 1474.29,274.29 SYNCHRO.1
  4-BOT w16: SYNCHRO.1@1473.07,273.07 SYNCHRO.1
PAN2: Upic.18
PAN3: Upic.17
PAN4_QEA: Codeur.2 Upic.16 | length 467.1
  4-BOT w16: Upic.16 1260.75,1005.75 1290,1035 1320,1035 1415,1130 1455,1130 Codeur.2@1580,1255
PAN5_QEB: Codeur.3 Upic.15 | length 442
  4-BOT w16: Upic.15 1235.16,1030.16 1285,1080 1315,1080 1490,1255 Codeur.3@1490,1280
PAN8: Upic.27
PAN9: Upic.28
PAN10: Upic.29
PAN11: Upic.30
PAN12: Upic.33
PAN13: Upic.34
PAN14: Upic.35
PAN15: Upic.36
PBT1: Cbt1.2 Rbt1.1 Upic.13 | length 301.2
  4-BOT w12: Upic.13 Upic.13@1186.71,963.91
  4-BOT w16: Upic.13@1185,955 1185,1015 1213,1043
  4-BOT w20: 1215,1050 1215,1170 Rbt1.1@1270,1225
PGC: ICSP.5 Upic.19 | length 773.9
  4-BOT w16: Upic.19 1337.52,1002.52 1420,1085 1660,1085 1780,1205 1965,1205 ICSP.5
PGD: ICSP.4 Upic.20 | length 695.5
  4-BOT w16: Upic.20 1363.11,983.11 1415,1035 1690,1035 1775,1120 ICSP.4
PIR_OFF: QirOFF.1 Rqoff.1 Upic.2 | length 1148.6
  4-BOT w16: QirOFF.1@785,1970 785,1965 675,1855 675,1430 815,1290 902.48,1202.52 Upic.2
PIR_ON: QirON.1 Rqon.2 Upic.3 | length 837.9
  4-BOT w16: QirON.1@725,1715 QirON.1@735,1705 ; Rqon.2@745,1525 745,1405 928.07,1221.93 Upic.3
  4-BOT w25: QirON.1@735,1705 735,1535 Rqon.2@745,1525
PRA14_INT3: Upic.52
PRA15_INT4: Upic.53
PRD0: Upic.58
PRE9_INT2: Upic.14
PU2TX: Upic.40
PWM1H: U_US.4 Upic.77 | length 544.9
  4-BOT w16: U_US.4@350,1010 490,1010 673.66,826.34 Upic.77
PWM1L: U_US.5 Upic.76 | length 553.2
  4-BOT w16: U_US.5@345,820 345,850 380,885 560,885 644.25,800.75 Upic.76
PWM2H: Umot.4 Upic.79 | length 424.2
  4-BOT w16: Umot.4 715,1210 750,1175 750,905 777.48,877.52 Upic.79
RE2: Umot.5 Upic.78 | length 278
  4-BOT w16: Umot.5 715,885 748.07,851.93 Upic.78
RG2_SCL: Upic.47
RG3_SDA: Upic.46
RG6_SCK2: Upic.6
RG7_SDI2: Upic.7
RG8_SDO2: Upic.8
RG9_SS2: Upic.10
U1RX: pad.0@1520,390 Ru1rx.1 UART.3 Upic.42 | length 723.7
  4-BOT w16: Upic.42 1337.52,317.48 1350,305 1420,305 1515,400 1590,400 1645,345 1670,345 1781.42,456.42 UART.3
U1TX: pad.0@1412.91,361.02 Ru1tx.1 UART.2 Upic.41 | length 426.5
  4-BOT w16: Upic.41 1428.82,358.82 1600,530 1691.42,530 UART.2
U2RX: Upic.39
US_A: T1.2 T2.2 T3.2 T4.2 T5.2 T6.2 T7.2 T8.2 T9.2 T10.2 T11.2 T12.2 T13.2 T14.2 T15.2 T16.2 T17.2 T18.2 T19.2 T20.2 U_US.1 | length 9121.4
  2-Signal w80: 2253.37,1384.22 ccw(c1125,1125) 2270.93,959.87
  2-Signal w100: -20,1220 -18.94,1221.06 T16.2 ; 38.36,893.36 T17.2 ; 55,1535 59.36,1539.36 T15.2 ; 145,530 203.72,588.72 T18.2 ; 245,1865 293.28,1816.72 T14.2 ; 365,270 366.82,270 T19.2 ; 485,2075 533.54,2026.46 T13.2 ; 640,85 640,90.05 T20.2 ; 830,2235 893.36,2171.64 T12.2 ; 1010,-15 1028.94,3.94 T1.2 ; 1220,2265 1221.06,2263.94 T11.2 ; T2.2 1380,77.95 1380,10 ; T10.2 1539.36,2189.36 1540,2190 ; 1660,110 1661.28,111.28 T3.2 ; T9.2 1816.72,1956.72 1860,2000 ; T4.2 1913.54,431.46 1980,365 ; T8.2 2026.46,1726.46 2070,1770 ; T5.2 2139.36,710.64 2180,670 ; T7.2 2211.64,1356.64 2245,1390 ; T6.2 2191.06,1028.94 2260,960
  4-BOT w25: T17.2 T17.2@101.31,911.31
  4-BOT w50: T17.2@101.31,911.31 180,990 180,1035
US_B: T1.1 T2.1 T3.1 T4.1 T5.1 T6.1 T7.1 T8.1 T9.1 T10.1 T11.1 T12.1 T13.1 T14.1 T15.1 T16.1 T17.1 T18.1 T19.1 T20.1 U_US.7 | length 9206.8
  3-GND w80: 2241.17,817.43 cw(c1125,1125) 2271.63,1285.23
  3-GND w100: -20,1030 -18.94,1028.94 T16.1 ; 5,1360 8.36,1356.64 T15.1 ; 65,695 80.64,710.64 T17.1 ; 110,1660 111.28,1661.28 T14.1 ; 255,375 278.18,375 T18.1 ; 355,1975 371.82,1975 T13.1 ; 525,150 588.72,213.72 T19.1 ; 680,2180 710.64,2149.36 T12.1 ; 805,25 817.05,25 T20.1 ; 1025,2265 1028.94,2261.06 T11.1 ; 1120,-20 1121.06,-20 T1.1 ; 1350,2250 1356.64,2243.36 T10.1 ; 1505,45 1539.36,79.36 T2.1 ; T9.1 1725,2090.18 1725,2095 ; 1815,210 1816.72,211.72 T3.1 ; T8.1 1980,1883.18 1980,1885 ; T4.1 2060,555.18 2060,470 ; T7.1 2129.36,1539.36 2175,1585 ; T5.1 2230,812.05 ; T6.1 2196.06,1221.06 2260,1285
  4-BOT w50: T17.1 200.64,710.64 245,755 U_US.7@245,850
VCC: ALIM.1 Cin2.2 Cin.2 Cmot.2 Cus.2 pad.0@267.91,992.2 pad.0@267.91,1032.2 pad.0@640,1220 pad.0@640,1260 U_US.2 U_US.3 U_US.6 Umot.2 Umot.3 Umot.6 Ureg.1 | length 2388.1
  1-TOP w50: Cus.2@255,990 320,1055 320,1520 575,1520 597.5,1542.5 ; Cmot.2@625,1210 615,1220 615,1525 597.5,1542.5 ; Ureg.1@905.03,1940 803.48,1940 735,1871.52 735,1680 597.5,1542.5
  4-BOT w25: U_US.2@245,985 U_US.3@295,985 ; U_US.2@245,1005 U_US.3@295,1005 ; U_US.2@245,1025 U_US.3@295,1025 ; U_US.2@245,1045 U_US.3@295,1045 ; U_US.6 U_US.3@295,985 ; U_US.3@295,995 U_US.3@295,985 ; Umot.2@620,1240 660,1240 665,1245 Umot.3 Umot.6
VDD: "Porte ET.6" Ccod.2 Cd33.2 Cdpic1.1 Cdpic2.1 Cdpic3.1 Cdpic4.1 Codeur.4 Cout2.2 Cout.2 DIR.1 ICSP.2 OSC3.3.1 OSC3.3.4 pad.0@685,1335 pad.0@700,700 pad.0@960,1780 pad.0@1045,1540 pad.0@1115.32,1785 pad.0@1140.85,1049.13 pad.0@1182.91,425 pad.0@1332.91,1525 pad.0@1479.45,815 pad.0@1509.45,625 pad.0@1570,1537.09 Rd455.2 RdOR.2 RintPu.1 Rmclr.2 Rpbt1.2 Rqoff.2 Rset33a.2 Ru1rx.2 Ru1tx.2 UART.1 Upic.12 Upic.24 Upic.25 Upic.32 Upic.48 Upic.71 Ureg.3 | length 6543.2
  1-TOP w25: pad.0@690,1335 914.43,1335 ; RintPu.1 745,790 760,775 ; 1325,655 1325,660.55 pad.0@1479.45,815
  1-TOP w30: 715,715 914.43,914.43 ; 914.43,1749.39 914.43,1670.57 1045,1540 1060,1525 1332.91,1525 pad.0@1585,1525 ; pad.0@950.03,1785 pad.0@1114.5,1785 ; 970,1590 1175,1385 1175,1365 ; 1100,655 1325,655 1455,655 1487.09,622.91 ; DIR.1 1175,1365 ; Ru1tx.2 1440,557.09 1480,557.09 1480,615.83 1487.09,622.91 ; Codeur.4 Codeur.4@1390,1295 ; Ccod.2@1390,1435 Codeur.4@1390,1295 ; Rmclr.2@1600,625 1720,745 1720,790 1805,875 1880,875 1925,920 ICSP.2 ; UART.1 1580,500 Rmclr.2 1487.09,622.91 ; 1175,1365 1245,1295 Codeur.4@1390,1295
  1-TOP w50: 914.43,1055 954.43,1015 1106.72,1015 pad.0@1140.85,1049.13
  1-TOP w100: Cout.2@914.43,1559.43 914.43,1335 914.43,1055 914.43,914.43 914.43,795.57 1200,510 1200,445 ; 915,1530 915,1740
  4-BOT w12: pad.0@1182.91,425 pad.0@1183.98,423.94 ; Upic.25 1479.25,800.75 1489.25,810.75 1473.66,826.34 Upic.24
  4-BOT w16: 710,720 710,695 732.2,672.8 Upic.71 ; Upic.12 pad.0@1158.39,1045 ; Upic.48 pad.0@1183.98,423.94 ; Upic.32 pad.0@1506.06,621.61
  4-BOT w20: RdOR.2 1117.4,1889.13 pad.0@1117.4,1792.32 ; OSC3.3.1 1233.94,1627.4 Cd33.2
  4-BOT w50: Cd33.2 1319.45,1643.46 Rd455.2 pad.0@1332.91,1525
pads on no net: "Porte ET.4" BT1.2 BT1.4 ICSP.6 OSC3.3.5 RledIR.3 SW1.2 SW1.4 Upic.1 Upic.4 Upic.5 Upic.21 Upic.22 Upic.37 Upic.38 Upic.44 Upic.59 Upic.60 Upic.61 Upic.62 Upic.63 Upic.66 Upic.67 Upic.68 Upic.69 Upic.80

## Polygon pours and split planes (outlines as drawn)
GND on 4-BOT "4-GND" (solid, remove dead copper, pour order 0): -460,2695 2725,2695 2725,-475 -460,-475
GND on 1-TOP "1-GND" (solid, remove dead copper, pour order 0): -460,2695 2725,2695 2725,-475 -460,-475
GND on 3-GND "3-GND" (solid, remove dead copper, pour order 0): -460,2695 2725,2695 2725,-475 -460,-475
GND on 2-Signal "2-GND" (solid, remove dead copper, pour order 0): -460,2695 2725,2695 2725,-475 -460,-475

## Keep-outs
Keep-Out Layer:
  the board outline again, w10

## Other copper
4-BOT:
  pour cut-out: 787.5,935 1442.5,935 1442.5,905 787.5,905
  pour cut-out: 792.5,440 1447.5,440 1447.5,380 792.5,380
  pour cut-out: 850,327.5 850,982.5 880,982.5 880,327.5
  pour cut-out: 1365,327.5 1365,982.5 1395,982.5 1395,327.5

## Silkscreen, mask and mechanical layers (free items; w line width, h text height)
Top Overlay:
  circle w10: c1125,1125 r20
  circle w10: c1125,1321.85 r100.05
  text "10u" at 770,1910 h40 r90
  text "100n" at 710,1755 h40
  text "100n" at 710,1690 h40
  text "+" at 325,1665 h40
  text "BT1" at 2025,1600 h40 r180
  text "ALIM" at 550,1545 h40 r330
  text "10u" at 795,1480 h40
  text "Codeur" at 1545,1405 h40
  text "MOTEUR" at 290,1270 h40 r270
  text "LED IR" at 1000,1205 h40 r90
  text "+" at 1380,1140 h40
  text "B" at 1470,1140 h40
  text "A" at 1575,1140 h40
  text "-" at 1675,1140 h40
  text "1u" at 690,1105 h40 r90
  text "ROBOT ESEO" at 1190,1040 h120
  text "Emetteur" at 660,955 h120
  text "1u" at 190,945 h40 r60
  text "int" at 385,875 h40
  text "Balise" at 605,855 h120
  text "2012" at 860,855 h120
  text "RST" at 1595,840 h40 r90
  text "Nirgal" at 780,750 h120
  text "100k" at 360,745 h40 r180
  text "100k" at 730,745 h40 r180
  text "10k" at 1445,665 h40
  text "10k" at 1475,560 h40 r90
  text "run" at 820,480 h40 r90
  text "uart" at 715,475 h40 r90
  text "100n" at 1085,460 h40
  text "10k" at 1330,375 h40 r90
  text "user" at 545,305 h40 r90
  text "Q" at 1105,245 h40
  text "100" at 1410,90 h40
Bottom Overlay:
  text "455kHz" at 1470,2045 h40
  text "100n" at 1165,2035 h40
  text "MOSN" at 740,2025 h40 r90
  text "MOSN" at 1035,1990 h40
  text "Rs" at 905,1830 h40
  text "MOSN" at 795,1820 h40
  text "OR" at 980,1750 h40 r90
  text "10k" at 750,1600 h40
  text "100k" at 1655,1580 h40
  text "Tune" at 795,1530 h40 r90
  text "10k" at 600,1490 h40 r90
  text "3.33kHz" at 1230,1385 h40 r180
  text "100k" at 1630,1265 h40 r180
  text "LED IR" at 995,1210 h40 r180
  text "100n" at 1180,1110 h40
  text "100n" at 1660,1105 h40 r90
  text "100n" at 1215,1095 h40 r180
  text "Moteur" at 760,1040 h40 r270
  text "US" at 515,900 h40 r270
  text "100" at 1780,840 h40 r270
  text "DSPIC30F" at 990,775 h40 r135
  text "100n" at 665,720 h40 r90
  text "100n" at 1565,575 h40 r270
  text "1k" at 710,495 h40
  text "1k" at 640,285 h40 r180
  text "22p" at 1175,230 h40
  text "1k" at 785,185 h40 r180
  text "synchro" at 1750,150 h40 r25
Mechanical 15:
  circle w30: c1125,1125 r1050.01
  circle w10: c1125,1125 r500
  circle w10: c1125,1321.85 r590.55

## Dimensions
534.45,1715.55 to 1125,-115 on Mechanical 15
495.08,613.19 to 1125,-115 on Mechanical 15
1676.18,1754.92 to 1125,-115 on Mechanical 15
534.45,1715.55 to -115,1125 on Mechanical 15
495.08,613.19 to -115,1125 on Mechanical 15
1125,1320 to -115,1125 on Mechanical 15
1125,1320 to 1125,-115 on Mechanical 15
1676.18,1754.92 to -115,1125 on Mechanical 15
1125,1125 to 2660,-250 on Mechanical 15

## Text inside footprints (layer, text, board x,y; h text height)
RledIR: Bottom Overlay "+" at 260,1385 h60